# Altium PCB Copy of pcb.PcbDoc
Units mil, origin at the board's own origin, x right, y up, seen from the top; angles counter-clockwise.
Board outline 2290 x 1595 mil, 2 copper layers (Top Layer, Bottom Layer); 16 components, 20 nets, 90 pads, 10 vias.
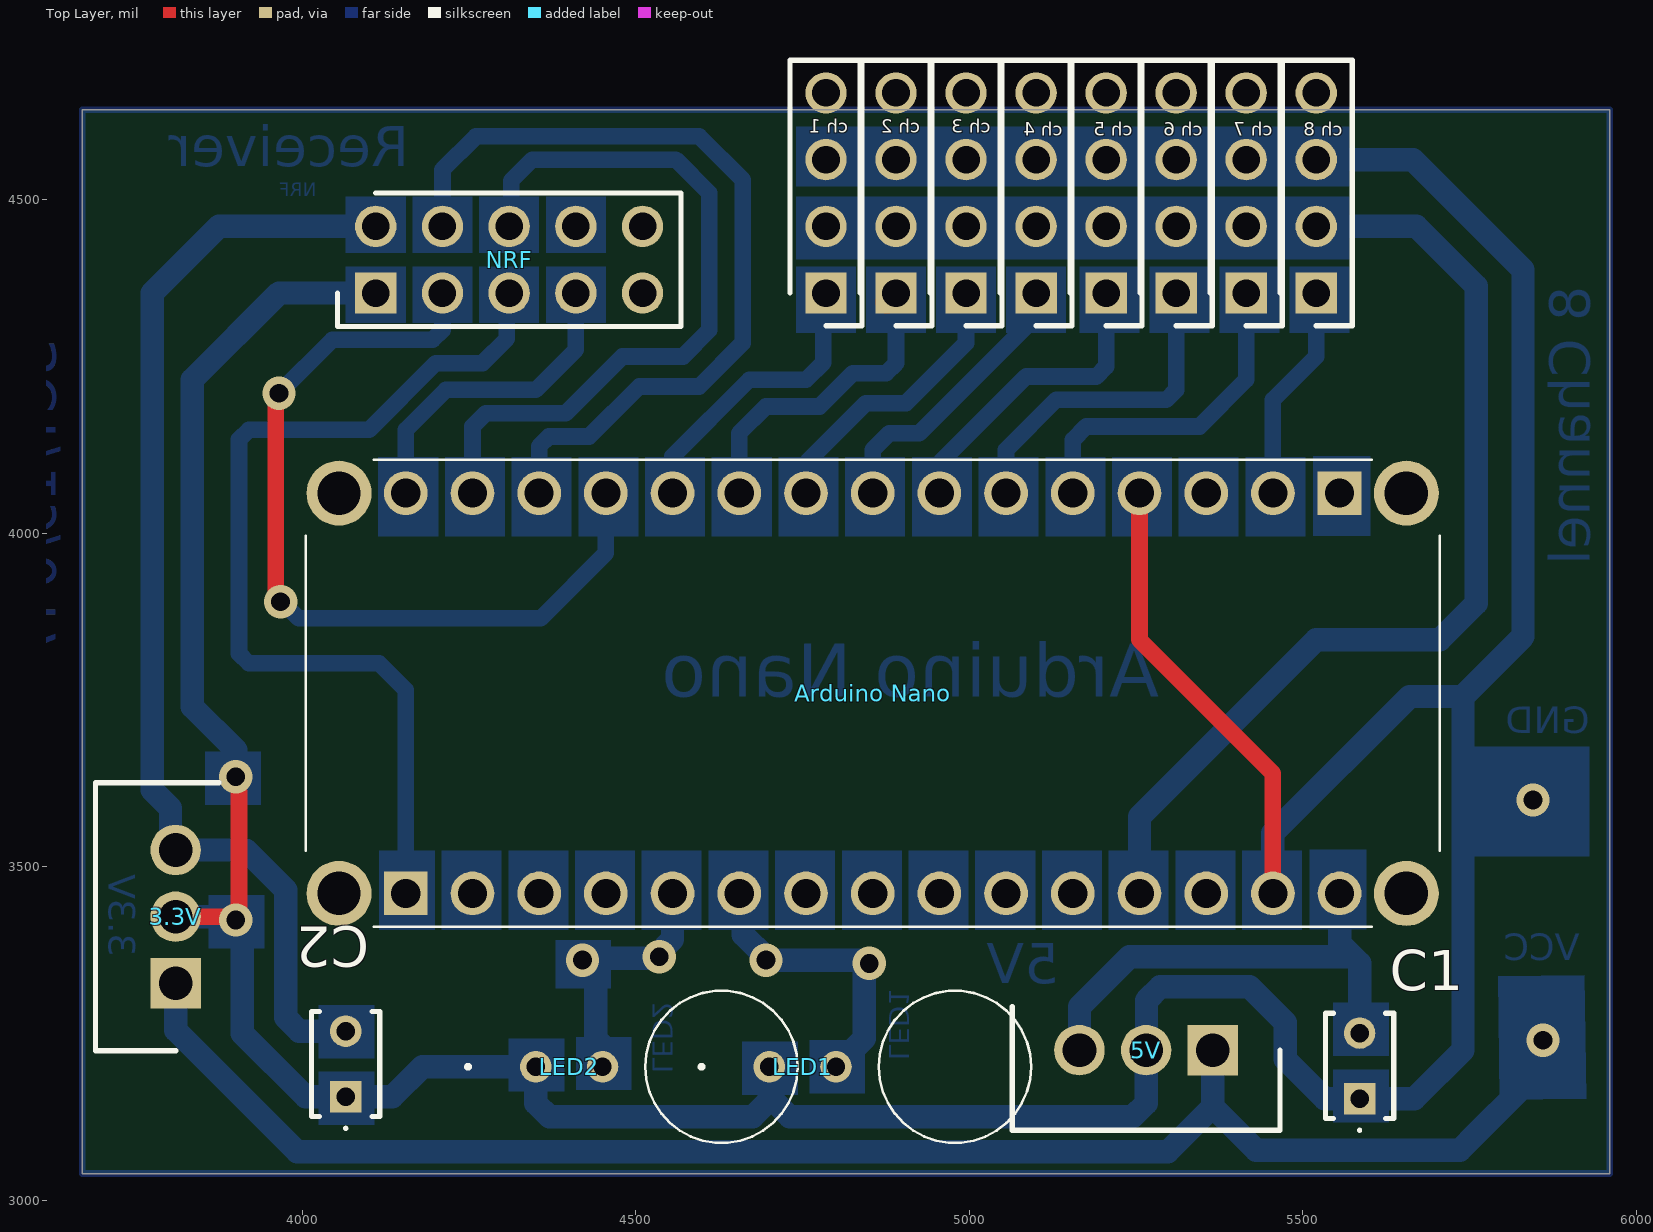
[diagram p0: Top Layer view]
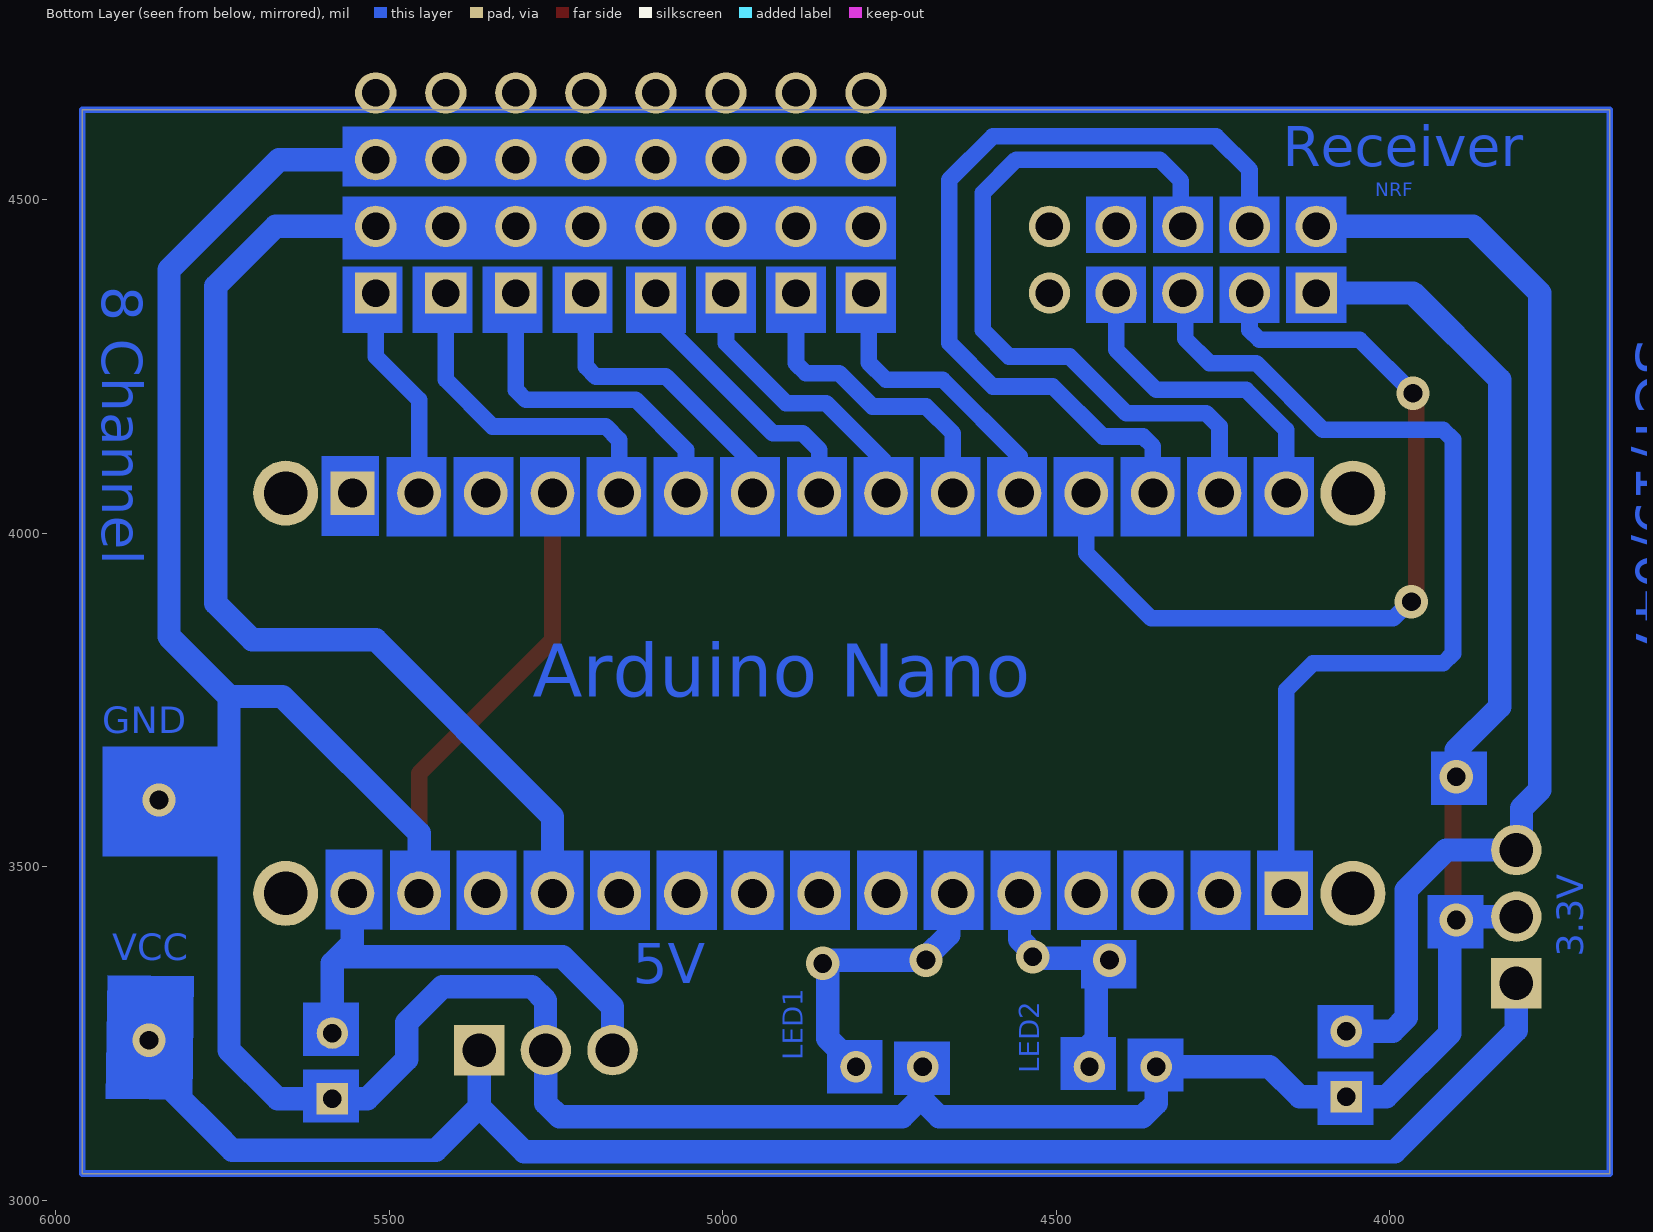
[diagram p1: Bottom Layer view, seen from below]

## Layer stack, top to bottom
Top Solder: solder mask 0.4, Solder Resist, Dk 3.5
Top Layer: signal copper 1.4
Dielectric 1: dielectric 12.6, FR-4, Dk 4.8
Bottom Layer: signal copper 1.4
Bottom Solder: solder mask 0.4, Solder Resist, Dk 3.5

## Board outline
3670,3040 3670,4635 5960,4635 5960,3040

## Design rules (kind name [scope] priority, off if disabled: settings)
Clearance [All] p1: gap=10 ignorepadtopadclearanceinfootprint=FALSE except(0: Arc-Hole Track-Hole SMDPad-Hole THPad-Hole Via-Hole Fill-Hole Poly-Hole Region-Hole Text-Hole)
PolygonConnect [All] p1: connectstyle=Relief reliefconductorwidth=10 reliefentries=4 polygonreliefangle="90 Angle" airgapwidth=10
RoutingVias [All] p1: holewidth=28 width=50 viastyle="Through Hole" minholewidth=28 minwidth=50 maxholewidth=28 maxwidth=50
SolderMaskExpansion [All] p1: expansion=4 istentingtop=FALSE
Width [All] p1: maxlimit=60 minlimit=20 preferedwidth=25 minimp=50.000000 maximp=50.000000 favimp=50.000000
30 further rules are at their usual default settings.

## Classes and differential pairs
component class "drone remote": C1 C2 LED1 LED2

## Components (designator, comment, footprint, x,y, rotation, side; value= is the part's Value field where it differs from the comment)
3.3V "7803" TO254P470X1000X1610-3P 3810,3325 r90 top (schematic designator IC3)
5V "7805" TO254P470X1000X1610-3P 5365,3225 r180 top (schematic designator IC1)
"Arduino Nano" "ABX00028" ABX00028 4155,3460 r0 top (schematic designator IC2)
C1 "K152K15X7RF53L2" K152K15X7RF53L2 5585,3152.17 r90 top
C2 "K152K15X7RF53L2" K152K15X7RF53L2 4065,3155 r90 top
"ch 1" "signal" HDRV4W87P0X254_1X4_991X236X1155P 4785,4360 r90 top (schematic designator J10)
"ch 2" "signal" HDRV4W87P0X254_1X4_991X236X1155P 4890,4360 r90 top (schematic designator J9)
"ch 3" "signal" HDRV4W87P0X254_1X4_991X236X1155P 4995,4360 r90 top (schematic designator J8)
"ch 4" "signal" HDRV4W87P0X254_1X4_991X236X1155P 5100,4360 r90 top (schematic designator J6)
"ch 5" "signal" HDRV4W87P0X254_1X4_991X236X1155P 5205,4360 r90 top (schematic designator J5)
"ch 6" "signal" HDRV4W87P0X254_1X4_991X236X1155P 5310,4360 r90 top (schematic designator J4)
"ch 7" "signal" HDRV4W87P0X254_1X4_991X236X1155P 5415,4360 r90 top (schematic designator J3)
"ch 8" "signal" HDRV4W87P0X254_1X4_991X236X1155P 5520,4360 r90 top (schematic designator J2)
LED1 "LTL2V3EV3JSR" LTL2V3EV3JSR 4700,3200 r180 top
LED2 "LTL2V3EV3JSR" LTL2V3EV3JSR 4350,3200 r180 top
NRF "antena conn" HDRV10W87P254_2X5_1270X508X864P 4110,4360 r0 top (schematic designator J7)

## Footprints (in the part's own frame and the unit in brackets; to place one, negate y for a bottom-side part, rotate by r counter-clockwise, add the part's x,y. Pads: shape width x height; smd on the part's side, far side on the other; paste and mask are expansions set on the pad)
ABX00028 [mm]
  rect 1.665x1.665 hole 1.11: A1(0,0) B1(35.56,15.24)
  round 1.665 hole 1.11: A2(2.54,0) A3(5.08,0) A4(7.62,0) A5(10.16,0) A6(12.7,0) A7(15.24,0) A8(17.78,0) A9(20.32,0) A10(22.86,0) A11(25.4,0) A12(27.94,0) A13(30.48,0) A14(33.02,0) A15(35.56,0) B2(33.02,15.24) B3(30.48,15.24) B4(27.94,15.24) B5(25.4,15.24) B6(22.86,15.24) B7(20.32,15.24) B8(17.78,15.24) B9(15.24,15.24) B10(12.7,15.24) B11(10.16,15.24) B12(7.62,15.24) B13(5.08,15.24) B14(2.54,15.24) B15(0,15.24)
  round 2.475 hole 1.65: MH1(-2.54,0) MH2(-2.54,15.24) MH3(38.1,15.24) MH4(38.1,0)
  silkscreen extent -3.81,-1.27 39.37,16.51, body extent -4.94,-1.27 39.39,16.51, height 6
HDRV4W87P0X254_1X4_991X236X1155P [mm]
  rect 1.575x1.575 hole 1.05: 1(0,0)
  round 1.575 hole 1.05: 2(2.54,0) 3(5.08,0) 4(7.62,0)
  silkscreen extent -1.25,-1.37 8.87,1.37, body extent -1.15,-1.19 8.75,1.17, height 10.66
HDRV10W87P254_2X5_1270X508X864P [mm]
  rect 1.575x1.575 hole 1.05: 1(0,0)
  round 1.575 hole 1.05: 2(0,2.54) 3(2.54,0) 4(2.54,2.54) 5(5.08,0) 6(5.08,2.54) 7(7.62,0) 8(7.62,2.54) 9(10.16,0) 10(10.16,2.54)
  silkscreen extent -1.46,-1.27 11.62,3.81, body extent -1.27,-1.27 11.43,3.81, height 8.64
K152K15X7RF53L2 [mm]
  rect 1.2x1.2 hole 0.7: 1(0,0)
  round 1.2 hole 0.7: 2(2.5,0)
  silkscreen extent -1.25,-1.3 3.25,1.3, body extent -0.75,-1.3 3.25,1.3, height 5.7
LTL2V3EV3JSR [mm]
  round 1.2 hole 0.7: 1(0,0) 2(-2.54,0)
  silkscreen extent -9.97,-2.89 2.63,2.89, body extent -4.17,-2.89 1.63,2.89, height 12.8
TO254P470X1000X1610-3P [mm]
  rect 1.92x1.92 hole 1.28: 1(0,0)
  round 1.92 hole 1.28: 2(2.54,0) 3(5.08,0)
  silkscreen extent -2.56,-1.65 7.64,3.05, body extent -2.36,-1.93 7.44,2.37, height 18.25

## Part data
3.3V: library part 7805, "Integrated Circuit", Manufacturer_Name="Foshan Blue Rocket Elec", Datasheet Link=https://datasheet.lcsc.com/szlcsc/1812061730_BLUE-ROCKET-7805_C305416.pdf, Height=4.7mm, Manufacturer_Part_Number=7805
5V: "Integrated Circuit", Manufacturer_Name="Foshan Blue Rocket Elec", Datasheet Link=https://datasheet.lcsc.com/szlcsc/1812061730_BLUE-ROCKET-7805_C305416.pdf, Height=4.7mm, Manufacturer_Part_Number=7805
"Arduino Nano": "Integrated Circuit", Manufacturer_Name=Arduino, Mouser Part Number=782-ABX00028, Arrow Part Number=ABX00028, Arrow Price/Stock=https://www.arrow.com/en/products/abx00028/arduino-corporation?region=nac, Datasheet Link=https://store.arduino.cc/arduino-nano-every, Height=10mm, Manufacturer_Part_Number=ABX00028, Mouser Price/Stock=https://www.mouser.co.uk/ProductDetail/Arduino/ABX00028?qs=PzGy0jfpSMtit6rnFl8mVg%3D%3D
C1 C2: "Capacitor", Manufacturer_Name=Vishay, Mouser Part Number=594-K152K15RF53L2, Datasheet Link=https://www.vishay.com/doc?45171, Height=5.6mm, Manufacturer_Part_Number=K152K15X7RF53L2, Mouser Price/Stock=https://www.mouser.com/Search/Refine.aspx?Keyword=594-K152K15RF53L2
"ch 1" "ch 2" "ch 3" "ch 4" "ch 5" "ch 6" "ch 7" "ch 8": library part 0022032041, "Connector", Manufacturer_Name=Molex, Mouser Part Number=N/A, Arrow Part Number=0022032041, Arrow Price/Stock=https://www.arrow.com/en/products/0022032041/molex, Datasheet Link=http://www.molex.com/pdm_docs/sd/022032041_sd.pdf, Height=11.55mm, Manufacturer_Part_Number=0022032041, Mouser Price/Stock=https://www.mouser.co.uk/ProductDetail/Molex/0022032041?qs=PBcRNPEHKsrt5pJfEqGMHQ%3D%3D
LED1 LED2: "LED", Manufacturer_Name=Lite-On, Mouser Part Number=859-LTL2V3EV3JSR, Arrow Part Number=LTL2V3EV3JSR, Arrow Price/Stock=https://www.arrow.com/en/products/ltl2v3ev3jsr/lite-on-technology, Datasheet Link=https://componentsearchengine.com/Datasheets/1/LTL2V3EV3JSR.pdf, Height=12.7mm, Manufacturer_Part_Number=LTL2V3EV3JSR, Mouser Price/Stock=https://www.mouser.co.uk/ProductDetail/Lite-On/LTL2V3EV3JSR?qs=plZGoh4IuyGDOWbhxHlEvg%3D%3D
NRF: library part 0010897100, "Connector", Manufacturer_Name=Molex, Mouser Part Number=N/A, Arrow Part Number=0010897100, Arrow Price/Stock=https://www.arrow.com/en/products/0010897100/molex?region=nac, Datasheet Link=http://www.molex.com/pdm_docs/sd/010897100_sd.pdf, Height=8.64mm, Manufacturer_Part_Number=0010897100, Mouser Price/Stock=https://www.mouser.co.uk/ProductDetail/Molex/0010897100?qs=PBcRNPEHKsqIDCZzUxhahw%3D%3D

## Via types
v1: diameter 50, hole 28, Top Layer to Bottom Layer, 10 vias

## Nets (pads, with @x,y where several pads share a name; then routed paths per layer and width w, separated by ;. In a path a pad name is that pad's centre, name@x,y a point inside that pad or via, vN(x,y) a via of type N, cw(c..) or ccw(c..) an arc to the next point about the centre after c; other vN are vias at no path point)
GND: 3.3V.2 5V.2 "Arduino Nano.A14" "Arduino Nano.B4" "ch 1.3" "ch 2.3" "ch 3.3" "ch 4.3" "ch 5.3" "ch 6.3" "ch 7.3" "ch 8.3" C1.1 C2.1 LED1.1 LED2.1 NRF.1 | length 7295.9
  Top Layer w25: 3.3V.2 3890.36,3425 3905,3439.64 3905,3612.32 3904.78,3612.54 3904.78,3630.22 v1(3900,3635) ; 5255,4060 5255,3840 5455,3640 5455,3460
  Bottom Layer w35: 3.3V.2 3880,3425 3910,3395 3910,3250 4005,3155 4135,3155 4180,3200 LED2.1 4350,3145.5 4370.5,3125 4675,3125 4700,3150 LED1.1 ; v1(3900,3635) 3900,3675 3835,3740 3835,4230 3965,4360 NRF.1 ; 4700,3155.5 4730.5,3125 5244.5,3125 5265,3145.5 5V.2 ; 5V.2@5265.54,3225.54 5265.54,3299.5 5286.05,3320 5420,3320 5473.51,3266.49 5473.51,3211.49 5532.83,3152.17 5667.17,3152.17 5740.07,3225.07 5740.07,3755.07 ; 5455,3460 5455,3550 5660.07,3755.07 5740.07,3755.07 ; 5520,4560 5665,4560 5830,4395 5830,3845 5740.07,3755.07
  Bottom Layer w40: 4785,4560 4890,4560 4995,4560 5100,4560 5205,4560 5310,4560 5415,4560 5520,4560
  other v1: 3900,3420 5845,3600
NetC1_2: 5V.3 "Arduino Nano.A15" C1.2 | length 727.9
  Bottom Layer w35: 5V.3 5165,3290 5240,3365 5575,3365 ; 5555,3460 5555,3385 5575,3365 ; C1.2 5585,3355 5575,3365
NetC2_2: 3.3V.3 C2.2 NRF.2 | length 1705.3
  Bottom Layer w35: C2.2 3995.5,3253.43 3975,3273.93 3975,3465 3915,3525 3.3V.3 3802.23,3532.77 3802.23,3587.77 3775,3615 3775,4360 3875,4460 NRF.2
NetIC1_1: 3.3V.1 5V.1 | length 2337.8
  Bottom Layer w35: 3.3V.1 3810,3255 3992.5,3072.5 5297.5,3072.5 5365,3140 ; 5V.1 5365,3140 ; 5825,3165 5760,3100 5735,3075 5430,3075 5365,3140
  other v1: 5860,3240
NetIC2_A1: "Arduino Nano.A1" NRF.5 | length 1432.4
  Bottom Layer w25: 4155,3460 4155,3765 4115,3805 3919.64,3805 3905,3819.64 3905,4140.36 3919.64,4155 4100,4155 4200,4255 4270,4255 4306.5,4291.5 4306.5,4356.5 NRF.5
NetIC2_A5: "Arduino Nano.A5" LED2.2 | length 390.2
  Bottom Layer w35: LED2.2 4447.66,3202.34 4447.66,3233.83 4440,3241.49 4440,3340 v1(4420,3360) 4422.5,3362.5 4528.07,3362.5 4531.93,3366.36 4531.93,3368.07 4555,3391.13 4555,3460
  other v1: 4535,3365
NetIC2_A6: "Arduino Nano.A6" LED1.2 | length 449.4
  Bottom Layer w35: 4655,3460 4660.85,3454.15 4660.85,3398.21 4695,3364.06 v1(4695,3360) 4840.94,3360 4845.94,3355 v1(4850,3355) 4850,3350.94 4842.5,3343.45 4842.5,3242.5 LED1.2
NetIC2_A12: "Arduino Nano.A12" "ch 1.2" "ch 2.2" "ch 3.2" "ch 4.2" "ch 5.2" "ch 6.2" "ch 7.2" "ch 8.2" | length 2239.8
  Bottom Layer w35: 5255,3460 5255,3575 5520,3840 5705,3840 5760,3895 5760,4370 5670,4460 5520,4460
  Bottom Layer w40: 4785,4460 4890,4460 4995,4460 5100,4460 5205,4460 5310,4460 5415,4460 5520,4460
NetIC2_B2: "Arduino Nano.B2" "ch 8.1" | length 326.9
  Bottom Layer w25: 5455,4060 5455,4200 5520,4265 5520,4360
NetIC2_B5: "Arduino Nano.B5" "ch 7.1" | length 507.3
  Bottom Layer w25: 5155,4060 5155,4140 5175,4160 5345,4160 5415,4230 5415,4360
NetIC2_B6: "Arduino Nano.B6" "ch 6.1" | length 502.5
  Bottom Layer w25: 5055,4060 5055,4125 5130,4200 5295.36,4200 5310,4214.64 5310,4360
NetIC2_B7: "Arduino Nano.B7" "ch 5.1" | length 465.3
  Bottom Layer w25: 4955,4060 4957.19,4062.19 4957.19,4107.19 5085,4235 5190.36,4235 5205,4249.64 5205,4360
NetIC2_B8: "Arduino Nano.B8" "ch 4.1" | length 427.8
  Bottom Layer w25: 4855,4060 4855,4125 4880,4150 4925,4150 5084.98,4309.98 5084.98,4344.98 5100,4360
NetIC2_B9: "Arduino Nano.B9" "ch 3.1" | length 434.6
  Bottom Layer w25: 4755,4060 4757.19,4062.19 4757.19,4107.19 4845,4195 4905,4195 4995,4285 4995,4360
NetIC2_B10: "Arduino Nano.B10" "ch 2.1" | length 492.8
  Top Layer w35: 4876.5,4346.5 4890,4360
  Bottom Layer w25: 4655,4060 4655,4150 4695,4190 4775.5,4190 4825.5,4240 4875.36,4240 4890,4254.64 4890,4360
NetIC2_B11: "Arduino Nano.B11" "ch 1.1" | length 445.1
  Bottom Layer w25: 4555,4060 4555,4115 4670,4230 4755,4230 4780.99,4255.99 4780.99,4355.99
  Bottom Layer w35: 4780.99,4355.99 4785,4360
NetIC2_B12: "Arduino Nano.B12" NRF.3 | length 1300
  Top Layer w25: v1@3974.64,3890 3960,3904.64 3960,4195.36 v1@3974.64,4210
  Bottom Layer w25: v1(3965,4210) 4045,4290 4195.36,4290 4210,4304.64 NRF.3 ; v1(3967.32,3897.32) 3969.63,3897.32 3994.47,3872.49 4357.49,3872.49 4455,3970 4455,4060
NetIC2_B13: "Arduino Nano.B13" NRF.4 | length 1268.8
  Top Layer w35: 4344.69,4059.69 4346.43,4059.69
  Bottom Layer w25: NRF.4 4210,4545 4260,4595 4595,4595 4660,4530 4660,4285 4595,4220 4505,4220 4430,4145 4369.64,4145 4355,4130.36 4355,4060
NetIC2_B14: "Arduino Nano.B14" NRF.6 | length 1120.8
  Bottom Layer w25: 4255,4060 4255,4160 4275,4180 4395,4180 4480,4265 4570.5,4265 4610,4304.5 4610,4510 4560,4560 4344.64,4560 4313.15,4528.5 4313.15,4463.15 NRF.6
NetIC2_B15: "Arduino Nano.B15" NRF.7 | length 484.7
  Bottom Layer w25: 4155,4060 4155,4155 4215,4215 4350,4215 4410,4275 NRF.7
pads on no net: "Arduino Nano.A2" "Arduino Nano.A3" "Arduino Nano.A4" "Arduino Nano.A7" "Arduino Nano.A8" "Arduino Nano.A9" "Arduino Nano.A10" "Arduino Nano.A11" "Arduino Nano.A13" "Arduino Nano.B1" "Arduino Nano.B3" "Arduino Nano.MH1" "Arduino Nano.MH2" "Arduino Nano.MH3" "Arduino Nano.MH4" "ch 1.4" "ch 2.4" "ch 3.4" "ch 4.4" "ch 5.4" "ch 6.4" "ch 7.4" "ch 8.4" NRF.8 NRF.9 NRF.10
copper on no net: | length 7770
  Bottom Layer w10: 3670,3040 5960,3040 5960,4635 3670,4635 3670,3040

## Other copper
Bottom Layer:
  rectangle net GND: 5545.37,3116.2 5629.09,3196.2
  rectangle net NetC1_2: 5545.37,3216.2 5629.09,3296.2
  rectangle net NetIC2_A6: 4760,3160 4843.73,3240
  rectangle net GND: 4659.2,3157.66 4742.93,3237.66
  rectangle net NetIC2_A5: 4379.2,3317.66 4462.93,3390
  rectangle net GND: 3859.2,3377.66 3942.93,3457.66
  rectangle net GND: 3854.2,3592.66 3937.93,3672.66
  rectangle net NetC2_2: 4024.2,3212.66 4107.93,3292.66
  rectangle net GND: 4024.2,3112.66 4107.93,3192.66
  rectangle net GND: 4309.2,3162.66 4392.93,3242.66
  rectangle net NetIC2_A5: 4410,3165 4493.73,3245
  rectangle net NetIC2_A1: 4115,3405 4198.73,3524.48
  rectangle: 4208.73,3405 4298.73,3524.48
  rectangle: 4308.73,3405 4398.73,3524.48
  rectangle: 4408.73,3405 4498.73,3524.48
  rectangle: 4708.73,3405 4798.73,3524.48
  rectangle net NetIC2_A6: 4608.73,3405 4698.73,3524.48
  rectangle net NetIC2_A5: 4508.73,3405 4598.73,3524.48
  rectangle net NetIC2_A12: 5208.73,3405 5298.73,3524.48
  rectangle: 5308.73,3405 5398.73,3524.48
  rectangle net GND: 5408.73,3405 5498.73,3524.48
  rectangle: 5108.73,3405 5198.73,3524.48
  rectangle: 5008.73,3405 5098.73,3524.48
  rectangle: 4908.73,3405 4998.73,3524.48
  rectangle: 4808.73,3405 4898.73,3524.48
  rectangle net NetC1_2: 5510,3406.08 5595,3525.55
  rectangle: 5515,3996.08 5601.61,4115.55
  rectangle net NetIC2_B8: 4813.73,3995 4903.73,4114.48
  rectangle net NetIC2_B7: 4913.73,3995 5003.73,4114.48
  rectangle net NetIC2_B6: 5013.73,3995 5103.73,4114.48
  rectangle net NetIC2_B5: 5113.73,3995 5203.73,4114.48
  rectangle net NetIC2_B2: 5413.73,3995 5503.73,4114.48
  rectangle: 5313.73,3995 5403.73,4114.48
  rectangle net GND: 5213.73,3995 5303.73,4114.48
  rectangle net NetIC2_B12: 4413.73,3995 4503.73,4114.48
  rectangle net NetIC2_B11: 4513.73,3995 4603.73,4114.48
  rectangle net NetIC2_B10: 4613.73,3995 4703.73,4114.48
  rectangle net NetIC2_B9: 4713.73,3995 4803.73,4114.48
  rectangle net NetIC2_B12: 4413.73,3995 4503.73,4114.48
  rectangle net NetIC2_B13: 4313.73,3995 4403.73,4114.48
  rectangle net NetIC2_B14: 4213.73,3995 4303.73,4114.48
  rectangle net NetIC2_B15: 4113.73,3995 4203.73,4114.48
  rectangle net NetIC2_B7: 5165,4300 5255,4400
  rectangle net NetIC2_A12: 5165,4410 5255,4505
  rectangle net GND: 5165,4520 5255,4610
  rectangle net GND: 5270,4520 5360,4610
  rectangle net NetIC2_A12: 5270,4410 5360,4505
  rectangle net NetIC2_B6: 5270,4300 5360,4400
  rectangle net NetIC2_B2: 5480,4300 5570,4400
  rectangle net NetIC2_A12: 5480,4410 5570,4505
  rectangle net GND: 4740,4520 5570,4610
  rectangle net GND: 5375,4520 5465,4610
  rectangle net NetIC2_A12: 5375,4410 5465,4505
  rectangle net NetIC2_B5: 5375,4300 5465,4400
  rectangle net NetIC2_B9: 4950,4300 5040,4400
  rectangle net NetIC2_A12: 4950,4410 5040,4505
  rectangle net GND: 4950,4520 5040,4610
  rectangle net GND: 5055,4520 5145,4610
  rectangle net NetIC2_A12: 5055,4410 5145,4505
  rectangle net NetIC2_B8: 5055,4300 5145,4400
  rectangle net NetIC2_B10: 4845,4300 4935,4400
  rectangle net NetIC2_A12: 4845,4410 4935,4505
  rectangle net GND: 4845,4520 4935,4610
  rectangle net GND: 4740,4520 4830,4610
  rectangle net NetIC2_A12: 4740,4410 5570,4505
  rectangle net NetIC2_B11: 4740,4300 4830,4400
  rectangle net GND: 4065,4315 4155,4400
  rectangle net NetIC2_B12: 4165,4315 4255,4400
  rectangle net NetIC2_B15: 4365,4315 4455,4400
  rectangle net NetIC2_A1: 4265,4315 4355,4400
  rectangle net NetIC2_B14: 4265,4420 4355,4505
  rectangle: 4365,4420 4455,4505
  rectangle net NetIC2_B13: 4165,4420 4255,4505
  rectangle net NetC2_2: 4065,4420 4155,4505
  rectangle net GND: 5740,3515 5930,3680
  region net NetIC1_1: 5922.26,3337.81 5792.21,3335.86 5795,3150 5925.05,3151.95
  text "Receiver" at 4160,4550 h60
  text "8 Channel" at 5930,4370 h60 r90
  text "SCT/19/047" at 3630,4290 h60 r90
  text "GND" at 5930,3700 h40
  text "VCC" at 5915,3360 h40